# EAGLE board TXB0104_breakout Panel v10 (EAGLE 6.4), part 1 of 3
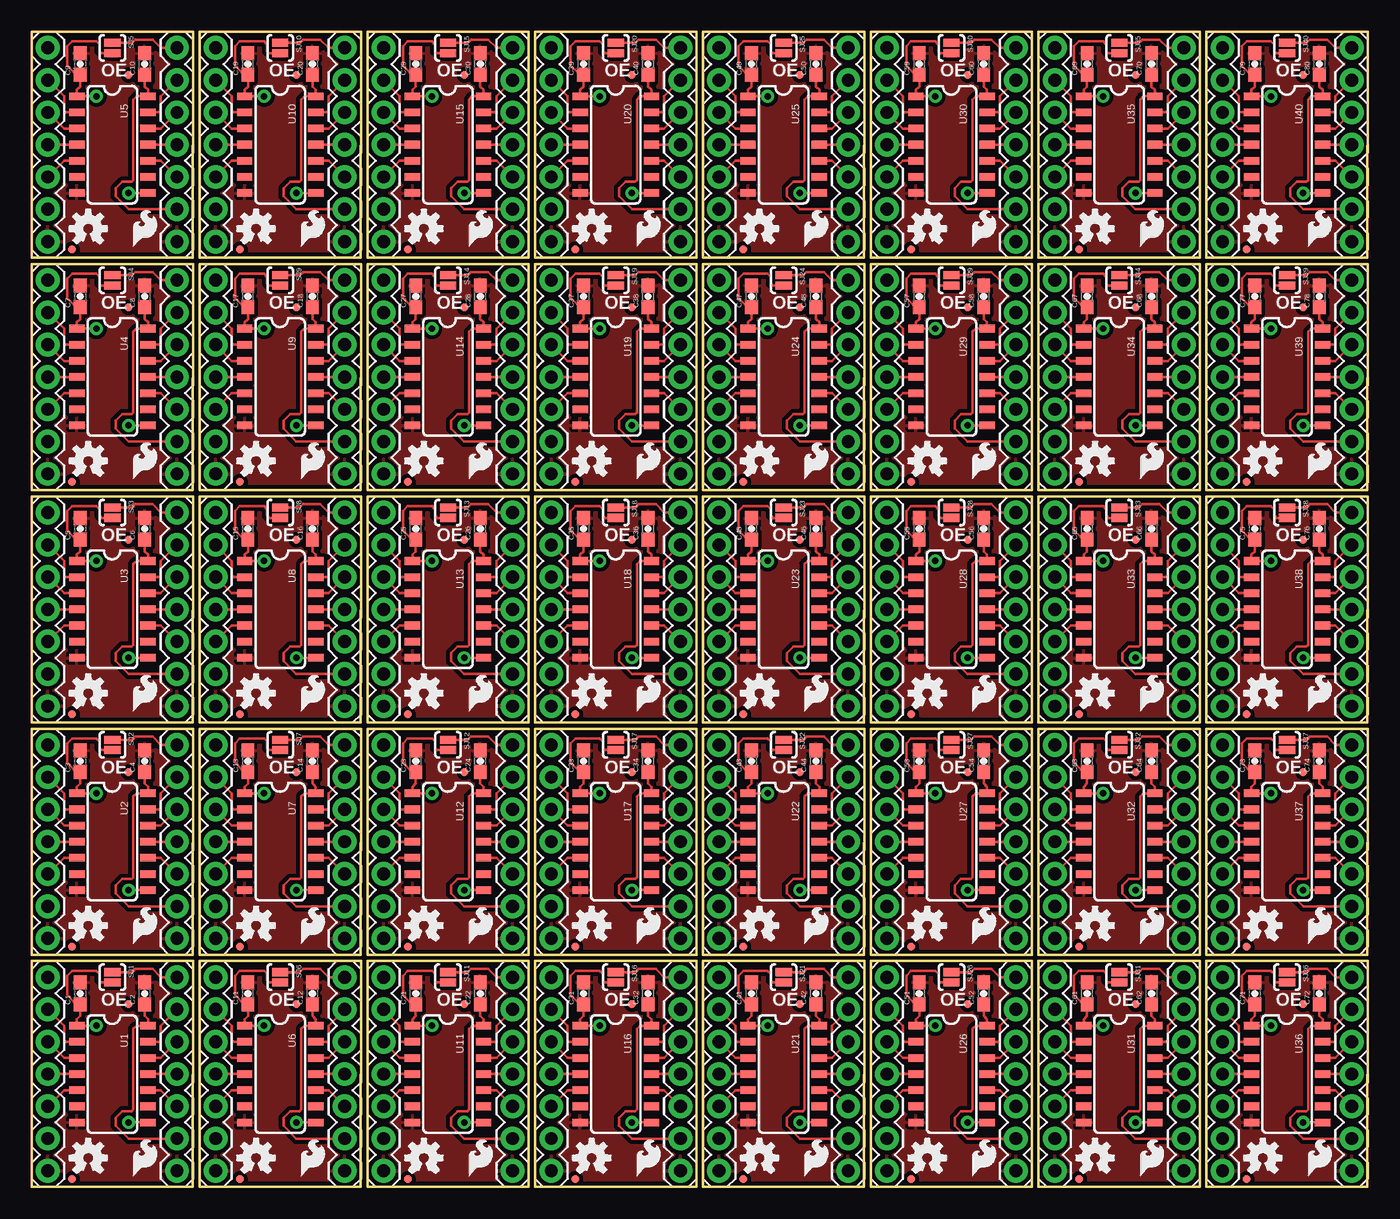
[diagram p0: board, top side]
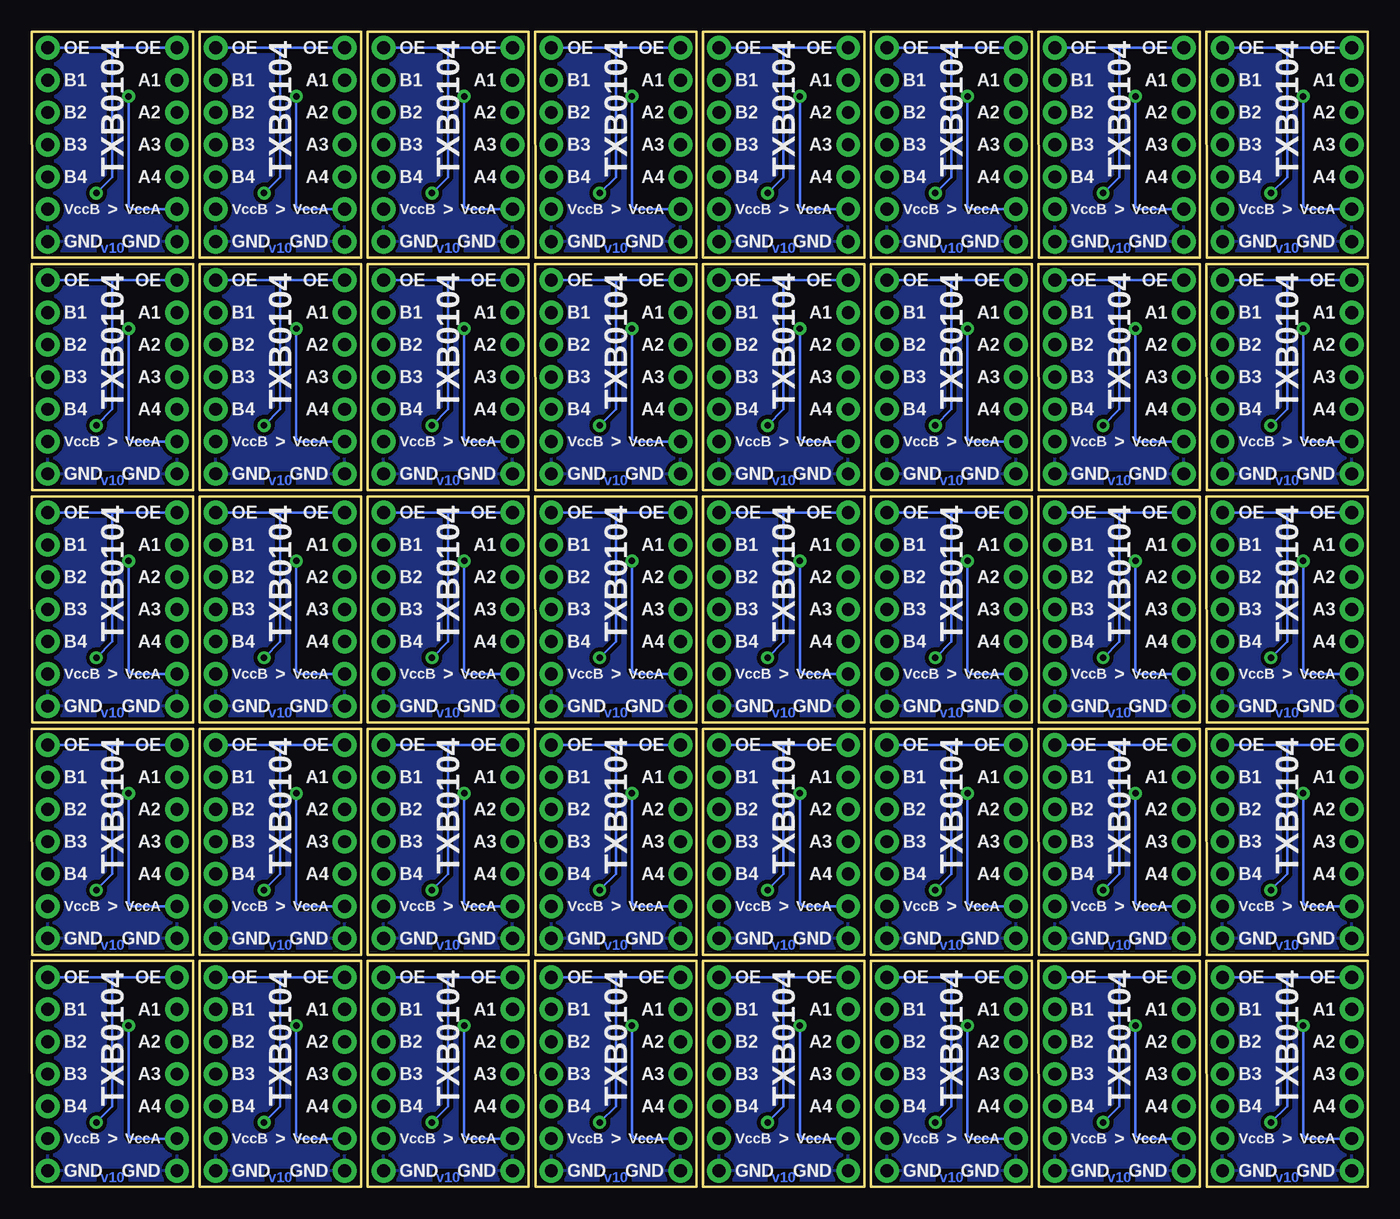
[diagram p1: board, bottom side, seen from below]

Size 105.16 x 90.93 mm. Coordinates in mm from the lower left corner, seen from the top.
Outline: 0,0 12.68,0 12.7,17.78 0,17.78 0,0
Outline: 0,18.29 12.68,18.29 12.7,36.07 0,36.07 0,18.29
Outline: 0,36.58 12.68,36.58 12.7,54.36 0,54.36 0,36.58
Outline: 0,54.86 12.68,54.86 12.7,72.64 0,72.64 0,54.86
Outline: 0,73.15 12.68,73.15 12.7,90.93 0,90.93 0,73.15
Outline: 13.21,0 25.89,0 25.91,17.78 13.21,17.78 13.21,0
Outline: 13.21,18.29 25.89,18.29 25.91,36.07 13.21,36.07 13.21,18.29
Outline: 13.21,36.58 25.89,36.58 25.91,54.36 13.21,54.36 13.21,36.58
Outline: 13.21,54.86 25.89,54.86 25.91,72.64 13.21,72.64 13.21,54.86
Outline: 13.21,73.15 25.89,73.15 25.91,90.93 13.21,90.93 13.21,73.15
Outline: 26.42,0 39.1,0 39.12,17.78 26.42,17.78 26.42,0
Outline: 26.42,18.29 39.1,18.29 39.12,36.07 26.42,36.07 26.42,18.29
Outline: 26.42,36.58 39.1,36.58 39.12,54.36 26.42,54.36 26.42,36.58
Outline: 26.42,54.86 39.1,54.86 39.12,72.64 26.42,72.64 26.42,54.86
Outline: 26.42,73.15 39.1,73.15 39.12,90.93 26.42,90.93 26.42,73.15
Outline: 39.62,0 52.3,0 52.32,17.78 39.62,17.78 39.62,0
Outline: 39.62,18.29 52.3,18.29 52.32,36.07 39.62,36.07 39.62,18.29
Outline: 39.62,36.58 52.3,36.58 52.32,54.36 39.62,54.36 39.62,36.58
Outline: 39.62,54.86 52.3,54.86 52.32,72.64 39.62,72.64 39.62,54.86
Outline: 39.62,73.15 52.3,73.15 52.32,90.93 39.62,90.93 39.62,73.15
Outline: 52.83,0 65.51,0 65.53,17.78 52.83,17.78 52.83,0
Outline: 52.83,18.29 65.51,18.29 65.53,36.07 52.83,36.07 52.83,18.29
Outline: 52.83,36.58 65.51,36.58 65.53,54.36 52.83,54.36 52.83,36.58
Outline: 52.83,54.86 65.51,54.86 65.53,72.64 52.83,72.64 52.83,54.86
Outline: 52.83,73.15 65.51,73.15 65.53,90.93 52.83,90.93 52.83,73.15
Outline: 66.04,0 78.72,0 78.74,17.78 66.04,17.78 66.04,0
Outline: 66.04,18.29 78.72,18.29 78.74,36.07 66.04,36.07 66.04,18.29
Outline: 66.04,36.58 78.72,36.58 78.74,54.36 66.04,54.36 66.04,36.58
Outline: 66.04,54.86 78.72,54.86 78.74,72.64 66.04,72.64 66.04,54.86
Outline: 66.04,73.15 78.72,73.15 78.74,90.93 66.04,90.93 66.04,73.15
Outline: 79.25,0 91.93,0 91.95,17.78 79.25,17.78 79.25,0
Outline: 79.25,18.29 91.93,18.29 91.95,36.07 79.25,36.07 79.25,18.29
Outline: 79.25,36.58 91.93,36.58 91.95,54.36 79.25,54.36 79.25,36.58
Outline: 79.25,54.86 91.93,54.86 91.95,72.64 79.25,72.64 79.25,54.86
Outline: 79.25,73.15 91.93,73.15 91.95,90.93 79.25,90.93 79.25,73.15
Outline: 92.46,0 105.14,0 105.16,17.78 92.46,17.78 92.46,0
Outline: 92.46,18.29 105.14,18.29 105.16,36.07 92.46,36.07 92.46,18.29
Outline: 92.46,36.58 105.14,36.58 105.16,54.36 92.46,54.36 92.46,36.58
Outline: 92.46,54.86 105.14,54.86 105.16,72.64 92.46,72.64 92.46,54.86
Outline: 92.46,73.15 105.14,73.15 105.16,90.93 92.46,90.93 92.46,73.15
Copper layers (1*16): Top 0.035mm / dielectric 1.5mm / Bottom 0.035mm
Design rules "Sparkfun": minimum track width 8mil, minimum drill 20mil, track to track 8mil, track to pad 8mil, pad to pad 8mil, via to via 8mil, smd to smd 8mil, copper to edge 8mil, drill to drill 8mil, minimum pad ring 12mil, minimum via ring 10mil, stop-mask expansion 4mil, vias tented up to drill 20mil, thermal gap 10mil

## Footprints (pad centres in the part's own frame; a part is rotated, then mirrored left to right if it is on the bottom)
0603-CAP = smd 1.1 x 1: 1 -0.85,0; 2 0.85,0
MICRO-FIDUCIAL = smd 0.635 x 0.635: 1 0,0
1X07 = drill 1.016 pad 1.88: 1 0,0; 2 2.54,0; 3 5.08,0; 4 7.62,0; 5 10.16,0; 6 12.7,0; 7 15.24,0
SJ_2S-NOTRACE = smd 0.635 x 1.27: 1 -0.401,0; 2 0.413,0
SO14 = smd 0.6 x 1.2: 1 -3.81,-2.8; 2 -2.54,-2.8; 3 -1.27,-2.8; 4 0,-2.8; 5 1.27,-2.8; 6 2.54,-2.8; 7 3.81,-2.8; 8 3.81,2.8; 9 2.54,2.8; 10 1.27,2.8; 11 0,2.8; 12 -1.27,2.8; 13 -2.54,2.8; 14 -3.81,2.8

## Placement (x,y rotation side)
C1  0.1uF  [0603-CAP]  3.81,15.24 90 top
C2  0.1uF  [0603-CAP]  8.89,15.24 90 top
C3  0.1uF  [0603-CAP]  3.81,33.53 90 top
C4  0.1uF  [0603-CAP]  8.89,33.53 90 top
C5  0.1uF  [0603-CAP]  3.81,51.82 90 top
C6  0.1uF  [0603-CAP]  8.89,51.82 90 top
C7  0.1uF  [0603-CAP]  3.81,70.1 90 top
C8  0.1uF  [0603-CAP]  8.89,70.1 90 top
C9  0.1uF  [0603-CAP]  3.81,88.39 90 top
C10  0.1uF  [0603-CAP]  8.89,88.39 90 top
C11  0.1uF  [0603-CAP]  17.02,15.24 90 top
C12  0.1uF  [0603-CAP]  22.1,15.24 90 top
C13  0.1uF  [0603-CAP]  17.02,33.53 90 top
C14  0.1uF  [0603-CAP]  22.1,33.53 90 top
C15  0.1uF  [0603-CAP]  17.02,51.82 90 top
C16  0.1uF  [0603-CAP]  22.1,51.82 90 top
C17  0.1uF  [0603-CAP]  17.02,70.1 90 top
C18  0.1uF  [0603-CAP]  22.1,70.1 90 top
C19  0.1uF  [0603-CAP]  17.02,88.39 90 top
C20  0.1uF  [0603-CAP]  22.1,88.39 90 top
C21  0.1uF  [0603-CAP]  30.23,15.24 90 top
C22  0.1uF  [0603-CAP]  35.31,15.24 90 top
C23  0.1uF  [0603-CAP]  30.23,33.53 90 top
C24  0.1uF  [0603-CAP]  35.31,33.53 90 top
C25  0.1uF  [0603-CAP]  30.23,51.82 90 top
C26  0.1uF  [0603-CAP]  35.31,51.82 90 top
C27  0.1uF  [0603-CAP]  30.23,70.1 90 top
C28  0.1uF  [0603-CAP]  35.31,70.1 90 top
C29  0.1uF  [0603-CAP]  30.23,88.39 90 top
C30  0.1uF  [0603-CAP]  35.31,88.39 90 top
C31  0.1uF  [0603-CAP]  43.43,15.24 90 top
C32  0.1uF  [0603-CAP]  48.51,15.24 90 top
C33  0.1uF  [0603-CAP]  43.43,33.53 90 top
C34  0.1uF  [0603-CAP]  48.51,33.53 90 top
C35  0.1uF  [0603-CAP]  43.43,51.82 90 top
C36  0.1uF  [0603-CAP]  48.51,51.82 90 top
C37  0.1uF  [0603-CAP]  43.43,70.1 90 top
C38  0.1uF  [0603-CAP]  48.51,70.1 90 top
C39  0.1uF  [0603-CAP]  43.43,88.39 90 top
C40  0.1uF  [0603-CAP]  48.51,88.39 90 top
C41  0.1uF  [0603-CAP]  56.64,15.24 90 top
C42  0.1uF  [0603-CAP]  61.72,15.24 90 top
C43  0.1uF  [0603-CAP]  56.64,33.53 90 top
C44  0.1uF  [0603-CAP]  61.72,33.53 90 top
C45  0.1uF  [0603-CAP]  56.64,51.82 90 top
C46  0.1uF  [0603-CAP]  61.72,51.82 90 top
C47  0.1uF  [0603-CAP]  56.64,70.1 90 top
C48  0.1uF  [0603-CAP]  61.72,70.1 90 top
C49  0.1uF  [0603-CAP]  56.64,88.39 90 top
C50  0.1uF  [0603-CAP]  61.72,88.39 90 top
C51  0.1uF  [0603-CAP]  69.85,15.24 90 top
C52  0.1uF  [0603-CAP]  74.93,15.24 90 top
C53  0.1uF  [0603-CAP]  69.85,33.53 90 top
C54  0.1uF  [0603-CAP]  74.93,33.53 90 top
C55  0.1uF  [0603-CAP]  69.85,51.82 90 top
C56  0.1uF  [0603-CAP]  74.93,51.82 90 top
C57  0.1uF  [0603-CAP]  69.85,70.1 90 top
C58  0.1uF  [0603-CAP]  74.93,70.1 90 top
C59  0.1uF  [0603-CAP]  69.85,88.39 90 top
C60  0.1uF  [0603-CAP]  74.93,88.39 90 top
C61  0.1uF  [0603-CAP]  83.06,15.24 90 top
C62  0.1uF  [0603-CAP]  88.14,15.24 90 top
C63  0.1uF  [0603-CAP]  83.06,33.53 90 top
C64  0.1uF  [0603-CAP]  88.14,33.53 90 top
C65  0.1uF  [0603-CAP]  83.06,51.82 90 top
C66  0.1uF  [0603-CAP]  88.14,51.82 90 top
C67  0.1uF  [0603-CAP]  83.06,70.1 90 top
C68  0.1uF  [0603-CAP]  88.14,70.1 90 top
C69  0.1uF  [0603-CAP]  83.06,88.39 90 top
C70  0.1uF  [0603-CAP]  88.14,88.39 90 top
C71  0.1uF  [0603-CAP]  96.27,15.24 90 top
C72  0.1uF  [0603-CAP]  101.35,15.24 90 top
C73  0.1uF  [0603-CAP]  96.27,33.53 90 top
C74  0.1uF  [0603-CAP]  101.35,33.53 90 top
C75  0.1uF  [0603-CAP]  96.27,51.82 90 top
C76  0.1uF  [0603-CAP]  101.35,51.82 90 top
C77  0.1uF  [0603-CAP]  96.27,70.1 90 top
C78  0.1uF  [0603-CAP]  101.35,70.1 90 top
C79  0.1uF  [0603-CAP]  96.27,88.39 90 top
C80  0.1uF  [0603-CAP]  101.35,88.39 90 top
FID1  FIDUCIALUFIDUCIAL  [MICRO-FIDUCIAL]  7.62,14.38 0 top
FID2  FIDUCIALUFIDUCIAL  [MICRO-FIDUCIAL]  3.17,0.64 0 top
FID3  FIDUCIALUFIDUCIAL  [MICRO-FIDUCIAL]  7.62,32.66 0 top
FID4  FIDUCIALUFIDUCIAL  [MICRO-FIDUCIAL]  3.17,18.92 0 top
FID5  FIDUCIALUFIDUCIAL  [MICRO-FIDUCIAL]  7.62,50.95 0 top
FID6  FIDUCIALUFIDUCIAL  [MICRO-FIDUCIAL]  3.17,37.21 0 top
FID7  FIDUCIALUFIDUCIAL  [MICRO-FIDUCIAL]  7.62,69.24 0 top
FID8  FIDUCIALUFIDUCIAL  [MICRO-FIDUCIAL]  3.17,55.5 0 top
FID9  FIDUCIALUFIDUCIAL  [MICRO-FIDUCIAL]  7.62,87.53 0 top
FID10  FIDUCIALUFIDUCIAL  [MICRO-FIDUCIAL]  3.17,73.79 0 top
FID11  FIDUCIALUFIDUCIAL  [MICRO-FIDUCIAL]  20.83,14.38 0 top
FID12  FIDUCIALUFIDUCIAL  [MICRO-FIDUCIAL]  16.38,0.64 0 top
FID13  FIDUCIALUFIDUCIAL  [MICRO-FIDUCIAL]  20.83,32.66 0 top
FID14  FIDUCIALUFIDUCIAL  [MICRO-FIDUCIAL]  16.38,18.92 0 top
FID15  FIDUCIALUFIDUCIAL  [MICRO-FIDUCIAL]  20.83,50.95 0 top
FID16  FIDUCIALUFIDUCIAL  [MICRO-FIDUCIAL]  16.38,37.21 0 top
FID17  FIDUCIALUFIDUCIAL  [MICRO-FIDUCIAL]  20.83,69.24 0 top
FID18  FIDUCIALUFIDUCIAL  [MICRO-FIDUCIAL]  16.38,55.5 0 top
FID19  FIDUCIALUFIDUCIAL  [MICRO-FIDUCIAL]  20.83,87.53 0 top
FID20  FIDUCIALUFIDUCIAL  [MICRO-FIDUCIAL]  16.38,73.79 0 top
FID21  FIDUCIALUFIDUCIAL  [MICRO-FIDUCIAL]  34.04,14.38 0 top
FID22  FIDUCIALUFIDUCIAL  [MICRO-FIDUCIAL]  29.59,0.64 0 top
FID23  FIDUCIALUFIDUCIAL  [MICRO-FIDUCIAL]  34.04,32.66 0 top
FID24  FIDUCIALUFIDUCIAL  [MICRO-FIDUCIAL]  29.59,18.92 0 top
FID25  FIDUCIALUFIDUCIAL  [MICRO-FIDUCIAL]  34.04,50.95 0 top
FID26  FIDUCIALUFIDUCIAL  [MICRO-FIDUCIAL]  29.59,37.21 0 top
FID27  FIDUCIALUFIDUCIAL  [MICRO-FIDUCIAL]  34.04,69.24 0 top
FID28  FIDUCIALUFIDUCIAL  [MICRO-FIDUCIAL]  29.59,55.5 0 top
FID29  FIDUCIALUFIDUCIAL  [MICRO-FIDUCIAL]  34.04,87.53 0 top
FID30  FIDUCIALUFIDUCIAL  [MICRO-FIDUCIAL]  29.59,73.79 0 top
FID31  FIDUCIALUFIDUCIAL  [MICRO-FIDUCIAL]  47.24,14.38 0 top
FID32  FIDUCIALUFIDUCIAL  [MICRO-FIDUCIAL]  42.8,0.64 0 top
FID33  FIDUCIALUFIDUCIAL  [MICRO-FIDUCIAL]  47.24,32.66 0 top
FID34  FIDUCIALUFIDUCIAL  [MICRO-FIDUCIAL]  42.8,18.92 0 top
FID35  FIDUCIALUFIDUCIAL  [MICRO-FIDUCIAL]  47.24,50.95 0 top
FID36  FIDUCIALUFIDUCIAL  [MICRO-FIDUCIAL]  42.8,37.21 0 top
FID37  FIDUCIALUFIDUCIAL  [MICRO-FIDUCIAL]  47.24,69.24 0 top
FID38  FIDUCIALUFIDUCIAL  [MICRO-FIDUCIAL]  42.8,55.5 0 top
FID39  FIDUCIALUFIDUCIAL  [MICRO-FIDUCIAL]  47.24,87.53 0 top
FID40  FIDUCIALUFIDUCIAL  [MICRO-FIDUCIAL]  42.8,73.79 0 top
FID41  FIDUCIALUFIDUCIAL  [MICRO-FIDUCIAL]  60.45,14.38 0 top
FID42  FIDUCIALUFIDUCIAL  [MICRO-FIDUCIAL]  56.01,0.64 0 top
FID43  FIDUCIALUFIDUCIAL  [MICRO-FIDUCIAL]  60.45,32.66 0 top
FID44  FIDUCIALUFIDUCIAL  [MICRO-FIDUCIAL]  56.01,18.92 0 top
FID45  FIDUCIALUFIDUCIAL  [MICRO-FIDUCIAL]  60.45,50.95 0 top
FID46  FIDUCIALUFIDUCIAL  [MICRO-FIDUCIAL]  56.01,37.21 0 top
FID47  FIDUCIALUFIDUCIAL  [MICRO-FIDUCIAL]  60.45,69.24 0 top
FID48  FIDUCIALUFIDUCIAL  [MICRO-FIDUCIAL]  56.01,55.5 0 top
FID49  FIDUCIALUFIDUCIAL  [MICRO-FIDUCIAL]  60.45,87.53 0 top
FID50  FIDUCIALUFIDUCIAL  [MICRO-FIDUCIAL]  56.01,73.79 0 top
FID51  FIDUCIALUFIDUCIAL  [MICRO-FIDUCIAL]  73.66,14.38 0 top
FID52  FIDUCIALUFIDUCIAL  [MICRO-FIDUCIAL]  69.22,0.64 0 top
FID53  FIDUCIALUFIDUCIAL  [MICRO-FIDUCIAL]  73.66,32.66 0 top
FID54  FIDUCIALUFIDUCIAL  [MICRO-FIDUCIAL]  69.22,18.92 0 top
FID55  FIDUCIALUFIDUCIAL  [MICRO-FIDUCIAL]  73.66,50.95 0 top
FID56  FIDUCIALUFIDUCIAL  [MICRO-FIDUCIAL]  69.22,37.21 0 top
FID57  FIDUCIALUFIDUCIAL  [MICRO-FIDUCIAL]  73.66,69.24 0 top
FID58  FIDUCIALUFIDUCIAL  [MICRO-FIDUCIAL]  69.22,55.5 0 top
FID59  FIDUCIALUFIDUCIAL  [MICRO-FIDUCIAL]  73.66,87.53 0 top
FID60  FIDUCIALUFIDUCIAL  [MICRO-FIDUCIAL]  69.22,73.79 0 top
FID61  FIDUCIALUFIDUCIAL  [MICRO-FIDUCIAL]  86.87,14.38 0 top
FID62  FIDUCIALUFIDUCIAL  [MICRO-FIDUCIAL]  82.42,0.64 0 top
FID63  FIDUCIALUFIDUCIAL  [MICRO-FIDUCIAL]  86.87,32.66 0 top
FID64  FIDUCIALUFIDUCIAL  [MICRO-FIDUCIAL]  82.42,18.92 0 top
FID65  FIDUCIALUFIDUCIAL  [MICRO-FIDUCIAL]  86.87,50.95 0 top
FID66  FIDUCIALUFIDUCIAL  [MICRO-FIDUCIAL]  82.42,37.21 0 top
FID67  FIDUCIALUFIDUCIAL  [MICRO-FIDUCIAL]  86.87,69.24 0 top
FID68  FIDUCIALUFIDUCIAL  [MICRO-FIDUCIAL]  82.42,55.5 0 top
FID69  FIDUCIALUFIDUCIAL  [MICRO-FIDUCIAL]  86.87,87.53 0 top
FID70  FIDUCIALUFIDUCIAL  [MICRO-FIDUCIAL]  82.42,73.79 0 top
FID71  FIDUCIALUFIDUCIAL  [MICRO-FIDUCIAL]  100.08,14.38 0 top
FID72  FIDUCIALUFIDUCIAL  [MICRO-FIDUCIAL]  95.63,0.64 0 top
FID73  FIDUCIALUFIDUCIAL  [MICRO-FIDUCIAL]  100.08,32.66 0 top
FID74  FIDUCIALUFIDUCIAL  [MICRO-FIDUCIAL]  95.63,18.92 0 top
FID75  FIDUCIALUFIDUCIAL  [MICRO-FIDUCIAL]  100.08,50.95 0 top
FID76  FIDUCIALUFIDUCIAL  [MICRO-FIDUCIAL]  95.63,37.21 0 top
FID77  FIDUCIALUFIDUCIAL  [MICRO-FIDUCIAL]  100.08,69.24 0 top
FID78  FIDUCIALUFIDUCIAL  [MICRO-FIDUCIAL]  95.63,55.5 0 top
FID79  FIDUCIALUFIDUCIAL  [MICRO-FIDUCIAL]  100.08,87.53 0 top
FID80  FIDUCIALUFIDUCIAL  [MICRO-FIDUCIAL]  95.63,73.79 0 top
JP1  [1X07]  1.27,1.27 90 top
JP2  [1X07]  11.43,1.27 90 top
JP3  [1X07]  1.27,19.56 90 top
JP4  [1X07]  11.43,19.56 90 top
JP5  [1X07]  1.27,37.85 90 top
JP6  [1X07]  11.43,37.85 90 top
JP7  [1X07]  1.27,56.13 90 top
JP8  [1X07]  11.43,56.13 90 top
JP9  [1X07]  1.27,74.42 90 top
JP10  [1X07]  11.43,74.42 90 top
JP11  [1X07]  14.48,1.27 90 top
JP12  [1X07]  24.64,1.27 90 top
JP13  [1X07]  14.48,19.56 90 top
JP14  [1X07]  24.64,19.56 90 top
JP15  [1X07]  14.48,37.85 90 top
JP16  [1X07]  24.64,37.85 90 top
JP17  [1X07]  14.48,56.13 90 top
JP18  [1X07]  24.64,56.13 90 top
JP19  [1X07]  14.48,74.42 90 top
JP20  [1X07]  24.64,74.42 90 top
JP21  [1X07]  27.69,1.27 90 top
JP22  [1X07]  37.85,1.27 90 top
JP23  [1X07]  27.69,19.56 90 top
JP24  [1X07]  37.85,19.56 90 top
JP25  [1X07]  27.69,37.85 90 top
JP26  [1X07]  37.85,37.85 90 top
JP27  [1X07]  27.69,56.13 90 top
JP28  [1X07]  37.85,56.13 90 top
JP29  [1X07]  27.69,74.42 90 top
JP30  [1X07]  37.85,74.42 90 top
JP31  [1X07]  40.89,1.27 90 top
JP32  [1X07]  51.05,1.27 90 top
JP33  [1X07]  40.89,19.56 90 top
JP34  [1X07]  51.05,19.56 90 top
JP35  [1X07]  40.89,37.85 90 top
JP36  [1X07]  51.05,37.85 90 top
JP37  [1X07]  40.89,56.13 90 top
JP38  [1X07]  51.05,56.13 90 top
JP39  [1X07]  40.89,74.42 90 top
JP40  [1X07]  51.05,74.42 90 top
JP41  [1X07]  54.1,1.27 90 top
JP42  [1X07]  64.26,1.27 90 top
JP43  [1X07]  54.1,19.56 90 top
JP44  [1X07]  64.26,19.56 90 top
JP45  [1X07]  54.1,37.85 90 top
JP46  [1X07]  64.26,37.85 90 top
JP47  [1X07]  54.1,56.13 90 top
JP48  [1X07]  64.26,56.13 90 top
JP49  [1X07]  54.1,74.42 90 top
JP50  [1X07]  64.26,74.42 90 top
JP51  [1X07]  67.31,1.27 90 top
JP52  [1X07]  77.47,1.27 90 top
JP53  [1X07]  67.31,19.56 90 top
JP54  [1X07]  77.47,19.56 90 top
JP55  [1X07]  67.31,37.85 90 top
JP56  [1X07]  77.47,37.85 90 top
JP57  [1X07]  67.31,56.13 90 top
JP58  [1X07]  77.47,56.13 90 top
JP59  [1X07]  67.31,74.42 90 top
JP60  [1X07]  77.47,74.42 90 top
JP61  [1X07]  80.52,1.27 90 top
JP62  [1X07]  90.68,1.27 90 top
JP63  [1X07]  80.52,19.56 90 top
JP64  [1X07]  90.68,19.56 90 top
JP65  [1X07]  80.52,37.85 90 top
JP66  [1X07]  90.68,37.85 90 top
JP67  [1X07]  80.52,56.13 90 top
JP68  [1X07]  90.68,56.13 90 top
JP69  [1X07]  80.52,74.42 90 top
JP70  [1X07]  90.68,74.42 90 top
JP71  [1X07]  93.73,1.27 90 top
JP72  [1X07]  103.89,1.27 90 top
JP73  [1X07]  93.73,19.56 90 top
JP74  [1X07]  103.89,19.56 90 top
JP75  [1X07]  93.73,37.85 90 top
JP76  [1X07]  103.89,37.85 90 top
JP77  [1X07]  93.73,56.13 90 top
JP78  [1X07]  103.89,56.13 90 top
JP79  [1X07]  93.73,74.42 90 top
JP80  [1X07]  103.89,74.42 90 top
LOGO1  LOGO-SFESK  [SFE-LOGO-FLAME]  8,0.89 0 top
LOGO2  OSHW-LOGOS  [OSHW-LOGO-S]  4.45,2.29 0 top
LOGO3  LOGO-SFESK  [SFE-LOGO-FLAME]  8,19.18 0 top
LOGO4  OSHW-LOGOS  [OSHW-LOGO-S]  4.45,20.57 0 top
LOGO5  LOGO-SFESK  [SFE-LOGO-FLAME]  8,37.47 0 top
LOGO6  OSHW-LOGOS  [OSHW-LOGO-S]  4.45,38.86 0 top
LOGO7  LOGO-SFESK  [SFE-LOGO-FLAME]  8,55.75 0 top
LOGO8  OSHW-LOGOS  [OSHW-LOGO-S]  4.45,57.15 0 top
LOGO9  LOGO-SFESK  [SFE-LOGO-FLAME]  8,74.04 0 top
LOGO10  OSHW-LOGOS  [OSHW-LOGO-S]  4.45,75.44 0 top
LOGO11  LOGO-SFESK  [SFE-LOGO-FLAME]  21.21,0.89 0 top
LOGO12  OSHW-LOGOS  [OSHW-LOGO-S]  17.65,2.29 0 top
LOGO13  LOGO-SFESK  [SFE-LOGO-FLAME]  21.21,19.18 0 top
LOGO14  OSHW-LOGOS  [OSHW-LOGO-S]  17.65,20.57 0 top
LOGO15  LOGO-SFESK  [SFE-LOGO-FLAME]  21.21,37.47 0 top
LOGO16  OSHW-LOGOS  [OSHW-LOGO-S]  17.65,38.86 0 top
LOGO17  LOGO-SFESK  [SFE-LOGO-FLAME]  21.21,55.75 0 top
LOGO18  OSHW-LOGOS  [OSHW-LOGO-S]  17.65,57.15 0 top
LOGO19  LOGO-SFESK  [SFE-LOGO-FLAME]  21.21,74.04 0 top
LOGO20  OSHW-LOGOS  [OSHW-LOGO-S]  17.65,75.44 0 top
LOGO21  LOGO-SFESK  [SFE-LOGO-FLAME]  34.42,0.89 0 top
LOGO22  OSHW-LOGOS  [OSHW-LOGO-S]  30.86,2.29 0 top
LOGO23  LOGO-SFESK  [SFE-LOGO-FLAME]  34.42,19.18 0 top
LOGO24  OSHW-LOGOS  [OSHW-LOGO-S]  30.86,20.57 0 top
LOGO25  LOGO-SFESK  [SFE-LOGO-FLAME]  34.42,37.47 0 top
LOGO26  OSHW-LOGOS  [OSHW-LOGO-S]  30.86,38.86 0 top
LOGO27  LOGO-SFESK  [SFE-LOGO-FLAME]  34.42,55.75 0 top
LOGO28  OSHW-LOGOS  [OSHW-LOGO-S]  30.86,57.15 0 top
LOGO29  LOGO-SFESK  [SFE-LOGO-FLAME]  34.42,74.04 0 top
LOGO30  OSHW-LOGOS  [OSHW-LOGO-S]  30.86,75.44 0 top
LOGO31  LOGO-SFESK  [SFE-LOGO-FLAME]  47.62,0.89 0 top
LOGO32  OSHW-LOGOS  [OSHW-LOGO-S]  44.07,2.29 0 top
LOGO33  LOGO-SFESK  [SFE-LOGO-FLAME]  47.62,19.18 0 top
LOGO34  OSHW-LOGOS  [OSHW-LOGO-S]  44.07,20.57 0 top
LOGO35  LOGO-SFESK  [SFE-LOGO-FLAME]  47.62,37.47 0 top
LOGO36  OSHW-LOGOS  [OSHW-LOGO-S]  44.07,38.86 0 top
LOGO37  LOGO-SFESK  [SFE-LOGO-FLAME]  47.62,55.75 0 top
LOGO38  OSHW-LOGOS  [OSHW-LOGO-S]  44.07,57.15 0 top
LOGO39  LOGO-SFESK  [SFE-LOGO-FLAME]  47.62,74.04 0 top
LOGO40  OSHW-LOGOS  [OSHW-LOGO-S]  44.07,75.44 0 top
LOGO41  LOGO-SFESK  [SFE-LOGO-FLAME]  60.83,0.89 0 top
LOGO42  OSHW-LOGOS  [OSHW-LOGO-S]  57.28,2.29 0 top
LOGO43  LOGO-SFESK  [SFE-LOGO-FLAME]  60.83,19.18 0 top
LOGO44  OSHW-LOGOS  [OSHW-LOGO-S]  57.28,20.57 0 top
LOGO45  LOGO-SFESK  [SFE-LOGO-FLAME]  60.83,37.47 0 top
LOGO46  OSHW-LOGOS  [OSHW-LOGO-S]  57.28,38.86 0 top
LOGO47  LOGO-SFESK  [SFE-LOGO-FLAME]  60.83,55.75 0 top
LOGO48  OSHW-LOGOS  [OSHW-LOGO-S]  57.28,57.15 0 top
LOGO49  LOGO-SFESK  [SFE-LOGO-FLAME]  60.83,74.04 0 top
LOGO50  OSHW-LOGOS  [OSHW-LOGO-S]  57.28,75.44 0 top
LOGO51  LOGO-SFESK  [SFE-LOGO-FLAME]  74.04,0.89 0 top
LOGO52  OSHW-LOGOS  [OSHW-LOGO-S]  70.48,2.29 0 top
LOGO53  LOGO-SFESK  [SFE-LOGO-FLAME]  74.04,19.18 0 top
LOGO54  OSHW-LOGOS  [OSHW-LOGO-S]  70.48,20.57 0 top
LOGO55  LOGO-SFESK  [SFE-LOGO-FLAME]  74.04,37.47 0 top
LOGO56  OSHW-LOGOS  [OSHW-LOGO-S]  70.48,38.86 0 top
LOGO57  LOGO-SFESK  [SFE-LOGO-FLAME]  74.04,55.75 0 top
LOGO58  OSHW-LOGOS  [OSHW-LOGO-S]  70.48,57.15 0 top
LOGO59  LOGO-SFESK  [SFE-LOGO-FLAME]  74.04,74.04 0 top
LOGO60  OSHW-LOGOS  [OSHW-LOGO-S]  70.48,75.44 0 top
LOGO61  LOGO-SFESK  [SFE-LOGO-FLAME]  87.25,0.89 0 top
LOGO62  OSHW-LOGOS  [OSHW-LOGO-S]  83.69,2.29 0 top
LOGO63  LOGO-SFESK  [SFE-LOGO-FLAME]  87.25,19.18 0 top
LOGO64  OSHW-LOGOS  [OSHW-LOGO-S]  83.69,20.57 0 top
LOGO65  LOGO-SFESK  [SFE-LOGO-FLAME]  87.25,37.47 0 top
LOGO66  OSHW-LOGOS  [OSHW-LOGO-S]  83.69,38.86 0 top
LOGO67  LOGO-SFESK  [SFE-LOGO-FLAME]  87.25,55.75 0 top
LOGO68  OSHW-LOGOS  [OSHW-LOGO-S]  83.69,57.15 0 top
LOGO69  LOGO-SFESK  [SFE-LOGO-FLAME]  87.25,74.04 0 top
LOGO70  OSHW-LOGOS  [OSHW-LOGO-S]  83.69,75.44 0 top
LOGO71  LOGO-SFESK  [SFE-LOGO-FLAME]  100.46,0.89 0 top
LOGO72  OSHW-LOGOS  [OSHW-LOGO-S]  96.9,2.29 0 top
LOGO73  LOGO-SFESK  [SFE-LOGO-FLAME]  100.46,19.18 0 top
LOGO74  OSHW-LOGOS  [OSHW-LOGO-S]  96.9,20.57 0 top
LOGO75  LOGO-SFESK  [SFE-LOGO-FLAME]  100.46,37.47 0 top
LOGO76  OSHW-LOGOS  [OSHW-LOGO-S]  96.9,38.86 0 top
LOGO77  LOGO-SFESK  [SFE-LOGO-FLAME]  100.46,55.75 0 top
LOGO78  OSHW-LOGOS  [OSHW-LOGO-S]  96.9,57.15 0 top
LOGO79  LOGO-SFESK  [SFE-LOGO-FLAME]  100.46,74.04 0 top
LOGO80  OSHW-LOGOS  [OSHW-LOGO-S]  96.9,75.44 0 top
SJ1  SOLDERJUMPERNC2  [SJ_2S-NOTRACE]  6.35,16.51 270 top
SJ2  SOLDERJUMPERNC2  [SJ_2S-NOTRACE]  6.35,34.8 270 top
SJ3  SOLDERJUMPERNC2  [SJ_2S-NOTRACE]  6.35,53.09 270 top
SJ4  SOLDERJUMPERNC2  [SJ_2S-NOTRACE]  6.35,71.37 270 top
SJ5  SOLDERJUMPERNC2  [SJ_2S-NOTRACE]  6.35,89.66 270 top
SJ6  SOLDERJUMPERNC2  [SJ_2S-NOTRACE]  19.56,16.51 270 top
SJ7  SOLDERJUMPERNC2  [SJ_2S-NOTRACE]  19.56,34.8 270 top
SJ8  SOLDERJUMPERNC2  [SJ_2S-NOTRACE]  19.56,53.09 270 top
SJ9  SOLDERJUMPERNC2  [SJ_2S-NOTRACE]  19.56,71.37 270 top
SJ10  SOLDERJUMPERNC2  [SJ_2S-NOTRACE]  19.56,89.66 270 top
SJ11  SOLDERJUMPERNC2  [SJ_2S-NOTRACE]  32.77,16.51 270 top
SJ12  SOLDERJUMPERNC2  [SJ_2S-NOTRACE]  32.77,34.8 270 top
SJ13  SOLDERJUMPERNC2  [SJ_2S-NOTRACE]  32.77,53.09 270 top
SJ14  SOLDERJUMPERNC2  [SJ_2S-NOTRACE]  32.77,71.37 270 top
SJ15  SOLDERJUMPERNC2  [SJ_2S-NOTRACE]  32.77,89.66 270 top
SJ16  SOLDERJUMPERNC2  [SJ_2S-NOTRACE]  45.97,16.51 270 top
SJ17  SOLDERJUMPERNC2  [SJ_2S-NOTRACE]  45.97,34.8 270 top
SJ18  SOLDERJUMPERNC2  [SJ_2S-NOTRACE]  45.97,53.09 270 top
SJ19  SOLDERJUMPERNC2  [SJ_2S-NOTRACE]  45.97,71.37 270 top
SJ20  SOLDERJUMPERNC2  [SJ_2S-NOTRACE]  45.97,89.66 270 top
SJ21  SOLDERJUMPERNC2  [SJ_2S-NOTRACE]  59.18,16.51 270 top
SJ22  SOLDERJUMPERNC2  [SJ_2S-NOTRACE]  59.18,34.8 270 top
SJ23  SOLDERJUMPERNC2  [SJ_2S-NOTRACE]  59.18,53.09 270 top
SJ24  SOLDERJUMPERNC2  [SJ_2S-NOTRACE]  59.18,71.37 270 top
SJ25  SOLDERJUMPERNC2  [SJ_2S-NOTRACE]  59.18,89.66 270 top
SJ26  SOLDERJUMPERNC2  [SJ_2S-NOTRACE]  72.39,16.51 270 top
SJ27  SOLDERJUMPERNC2  [SJ_2S-NOTRACE]  72.39,34.8 270 top
SJ28  SOLDERJUMPERNC2  [SJ_2S-NOTRACE]  72.39,53.09 270 top
SJ29  SOLDERJUMPERNC2  [SJ_2S-NOTRACE]  72.39,71.37 270 top
SJ30  SOLDERJUMPERNC2  [SJ_2S-NOTRACE]  72.39,89.66 270 top
SJ31  SOLDERJUMPERNC2  [SJ_2S-NOTRACE]  85.6,16.51 270 top
SJ32  SOLDERJUMPERNC2  [SJ_2S-NOTRACE]  85.6,34.8 270 top
SJ33  SOLDERJUMPERNC2  [SJ_2S-NOTRACE]  85.6,53.09 270 top
SJ34  SOLDERJUMPERNC2  [SJ_2S-NOTRACE]  85.6,71.37 270 top
SJ35  SOLDERJUMPERNC2  [SJ_2S-NOTRACE]  85.6,89.66 270 top
SJ36  SOLDERJUMPERNC2  [SJ_2S-NOTRACE]  98.81,16.51 270 top
SJ37  SOLDERJUMPERNC2  [SJ_2S-NOTRACE]  98.81,34.8 270 top
SJ38  SOLDERJUMPERNC2  [SJ_2S-NOTRACE]  98.81,53.09 270 top
SJ39  SOLDERJUMPERNC2  [SJ_2S-NOTRACE]  98.81,71.37 270 top
SJ40  SOLDERJUMPERNC2  [SJ_2S-NOTRACE]  98.81,89.66 270 top
U1  [SO14]  6.35,8.89 270 top
U2  [SO14]  6.35,27.18 270 top
U3  [SO14]  6.35,45.47 270 top
U4  [SO14]  6.35,63.75 270 top
U5  [SO14]  6.35,82.04 270 top
U6  [SO14]  19.56,8.89 270 top
U7  [SO14]  19.56,27.18 270 top
U8  [SO14]  19.56,45.47 270 top
U9  [SO14]  19.56,63.75 270 top
U10  [SO14]  19.56,82.04 270 top
U11  [SO14]  32.77,8.89 270 top
U12  [SO14]  32.77,27.18 270 top
U13  [SO14]  32.77,45.47 270 top
U14  [SO14]  32.77,63.75 270 top
U15  [SO14]  32.77,82.04 270 top
U16  [SO14]  45.97,8.89 270 top
U17  [SO14]  45.97,27.18 270 top
U18  [SO14]  45.97,45.47 270 top
U19  [SO14]  45.97,63.75 270 top
U20  [SO14]  45.97,82.04 270 top
U21  [SO14]  59.18,8.89 270 top
U22  [SO14]  59.18,27.18 270 top
U23  [SO14]  59.18,45.47 270 top
U24  [SO14]  59.18,63.75 270 top
U25  [SO14]  59.18,82.04 270 top
U26  [SO14]  72.39,8.89 270 top
U27  [SO14]  72.39,27.18 270 top
U28  [SO14]  72.39,45.47 270 top
U29  [SO14]  72.39,63.75 270 top
U30  [SO14]  72.39,82.04 270 top
U31  [SO14]  85.6,8.89 270 top
U32  [SO14]  85.6,27.18 270 top
U33  [SO14]  85.6,45.47 270 top
U34  [SO14]  85.6,63.75 270 top
U35  [SO14]  85.6,82.04 270 top
U36  [SO14]  98.81,8.89 270 top
U37  [SO14]  98.81,27.18 270 top
U38  [SO14]  98.81,45.47 270 top
U39  [SO14]  98.81,63.75 270 top
U40  [SO14]  98.81,82.04 270 top

## Library data of the parts
C1-C80 = SparkFun-Capacitors; PROD_ID: CAP-00810
FID1-FID80 LOGO1-LOGO80 = SparkFun-Aesthetics
JP1-JP80 = SparkFun-Connectors
SJ1-SJ40 = SparkFun-Passives
U1-U40 = SparkFun-DigitalIC; PROD_ID: IC-11329

## Nets
3.3V: C1.1 JP1.2 SJ1.2 U1.1
3.3V1: C3.1 JP3.2 SJ2.2 U2.1
3.3V2: C5.1 JP5.2 SJ3.2 U3.1
3.3V3: C7.1 JP7.2 SJ4.2 U4.1
3.3V4: C9.1 JP9.2 SJ5.2 U5.1
3.3V5: C11.1 JP11.2 SJ6.2 U6.1
3.3V6: C13.1 JP13.2 SJ7.2 U7.1
3.3V7: C15.1 JP15.2 SJ8.2 U8.1
3.3V8: C17.1 JP17.2 SJ9.2 U9.1
3.3V9: C19.1 JP19.2 SJ10.2 U10.1
3.3V10: C21.1 JP21.2 SJ11.2 U11.1
3.3V11: C23.1 JP23.2 SJ12.2 U12.1
3.3V12: C25.1 JP25.2 SJ13.2 U13.1
3.3V13: C27.1 JP27.2 SJ14.2 U14.1
3.3V14: C29.1 JP29.2 SJ15.2 U15.1
3.3V15: C31.1 JP31.2 SJ16.2 U16.1
3.3V16: C33.1 JP33.2 SJ17.2 U17.1
3.3V17: C35.1 JP35.2 SJ18.2 U18.1
3.3V18: C37.1 JP37.2 SJ19.2 U19.1
3.3V19: C39.1 JP39.2 SJ20.2 U20.1
3.3V20: C41.1 JP41.2 SJ21.2 U21.1
3.3V21: C43.1 JP43.2 SJ22.2 U22.1
3.3V22: C45.1 JP45.2 SJ23.2 U23.1
3.3V23: C47.1 JP47.2 SJ24.2 U24.1
3.3V24: C49.1 JP49.2 SJ25.2 U25.1
3.3V25: C51.1 JP51.2 SJ26.2 U26.1
3.3V26: C53.1 JP53.2 SJ27.2 U27.1
3.3V27: C55.1 JP55.2 SJ28.2 U28.1
3.3V28: C57.1 JP57.2 SJ29.2 U29.1
3.3V29: C59.1 JP59.2 SJ30.2 U30.1
3.3V30: C61.1 JP61.2 SJ31.2 U31.1
3.3V31: C63.1 JP63.2 SJ32.2 U32.1
3.3V32: C65.1 JP65.2 SJ33.2 U33.1
3.3V33: C67.1 JP67.2 SJ34.2 U34.1
3.3V34: C69.1 JP69.2 SJ35.2 U35.1
3.3V35: C71.1 JP71.2 SJ36.2 U36.1
3.3V36: C73.1 JP73.2 SJ37.2 U37.1
3.3V37: C75.1 JP75.2 SJ38.2 U38.1
3.3V38: C77.1 JP77.2 SJ39.2 U39.1
3.3V39: C79.1 JP79.2 SJ40.2 U40.1
5V: C2.1 JP2.2 U1.14
5V1: C4.1 JP4.2 U2.14
5V2: C6.1 JP6.2 U3.14
5V3: C8.1 JP8.2 U4.14
5V4: C10.1 JP10.2 U5.14
5V5: C12.1 JP12.2 U6.14
5V6: C14.1 JP14.2 U7.14
5V7: C16.1 JP16.2 U8.14
5V8: C18.1 JP18.2 U9.14
5V9: C20.1 JP20.2 U10.14
5V10: C22.1 JP22.2 U11.14
5V11: C24.1 JP24.2 U12.14
5V12: C26.1 JP26.2 U13.14
5V13: C28.1 JP28.2 U14.14
5V14: C30.1 JP30.2 U15.14
5V15: C32.1 JP32.2 U16.14
5V16: C34.1 JP34.2 U17.14
5V17: C36.1 JP36.2 U18.14
5V18: C38.1 JP38.2 U19.14
5V19: C40.1 JP40.2 U20.14
5V20: C42.1 JP42.2 U21.14
5V21: C44.1 JP44.2 U22.14
5V22: C46.1 JP46.2 U23.14
5V23: C48.1 JP48.2 U24.14
5V24: C50.1 JP50.2 U25.14
5V25: C52.1 JP52.2 U26.14
5V26: C54.1 JP54.2 U27.14
5V27: C56.1 JP56.2 U28.14
5V28: C58.1 JP58.2 U29.14
5V29: C60.1 JP60.2 U30.14
5V30: C62.1 JP62.2 U31.14
5V31: C64.1 JP64.2 U32.14
5V32: C66.1 JP66.2 U33.14
5V33: C68.1 JP68.2 U34.14
5V34: C70.1 JP70.2 U35.14
5V35: C72.1 JP72.2 U36.14
5V36: C74.1 JP74.2 U37.14
5V37: C76.1 JP76.2 U38.14
5V38: C78.1 JP78.2 U39.14
5V39: C80.1 JP80.2 U40.14
B1: JP2.6 U1.13
B2: JP2.5 U1.12
B3: JP2.4 U1.11
B4: JP2.3 U1.10
B5: JP4.6 U2.13
B6: JP4.5 U2.12
B7: JP4.4 U2.11
B8: JP4.3 U2.10
B9: JP6.6 U3.13
B10: JP6.5 U3.12
B11: JP6.4 U3.11
B12: JP6.3 U3.10
B13: JP8.6 U4.13
B14: JP8.5 U4.12
B15: JP8.4 U4.11
B16: JP8.3 U4.10
B17: JP10.6 U5.13
B18: JP10.5 U5.12
B19: JP10.4 U5.11
B20: JP10.3 U5.10
B21: JP12.6 U6.13
B22: JP12.5 U6.12
B23: JP12.4 U6.11
B24: JP12.3 U6.10
B25: JP14.6 U7.13
B26: JP14.5 U7.12
B27: JP14.4 U7.11
B28: JP14.3 U7.10
B29: JP16.6 U8.13
B30: JP16.5 U8.12
B31: JP16.4 U8.11
B32: JP16.3 U8.10
B33: JP18.6 U9.13
B34: JP18.5 U9.12
B35: JP18.4 U9.11
B36: JP18.3 U9.10
B37: JP20.6 U10.13
B38: JP20.5 U10.12
B39: JP20.4 U10.11
B40: JP20.3 U10.10
B41: JP22.6 U11.13
B42: JP22.5 U11.12
B43: JP22.4 U11.11
B44: JP22.3 U11.10
B45: JP24.6 U12.13
B46: JP24.5 U12.12
B47: JP24.4 U12.11
B48: JP24.3 U12.10
B49: JP26.6 U13.13
B50: JP26.5 U13.12
B51: JP26.4 U13.11
B52: JP26.3 U13.10
B53: JP28.6 U14.13
B54: JP28.5 U14.12
B55: JP28.4 U14.11
B56: JP28.3 U14.10
B57: JP30.6 U15.13
B58: JP30.5 U15.12
B59: JP30.4 U15.11
B60: JP30.3 U15.10
B61: JP32.6 U16.13
B62: JP32.5 U16.12
B63: JP32.4 U16.11
B64: JP32.3 U16.10
B65: JP34.6 U17.13
B66: JP34.5 U17.12
B67: JP34.4 U17.11
B68: JP34.3 U17.10
B69: JP36.6 U18.13
B70: JP36.5 U18.12
B71: JP36.4 U18.11
B72: JP36.3 U18.10
B73: JP38.6 U19.13
B74: JP38.5 U19.12
B75: JP38.4 U19.11
B76: JP38.3 U19.10
B77: JP40.6 U20.13
B78: JP40.5 U20.12
B79: JP40.4 U20.11
B80: JP40.3 U20.10
B81: JP42.6 U21.13
B82: JP42.5 U21.12
B83: JP42.4 U21.11
B84: JP42.3 U21.10
B85: JP44.6 U22.13
B86: JP44.5 U22.12
B87: JP44.4 U22.11
B88: JP44.3 U22.10
B89: JP46.6 U23.13
B90: JP46.5 U23.12
B91: JP46.4 U23.11
B92: JP46.3 U23.10
B93: JP48.6 U24.13
B94: JP48.5 U24.12
B95: JP48.4 U24.11
B96: JP48.3 U24.10
B97: JP50.6 U25.13
B98: JP50.5 U25.12
B99: JP50.4 U25.11
B100: JP50.3 U25.10
B101: JP52.6 U26.13
B102: JP52.5 U26.12
B103: JP52.4 U26.11
B104: JP52.3 U26.10
B105: JP54.6 U27.13
B106: JP54.5 U27.12
B107: JP54.4 U27.11
B108: JP54.3 U27.10
B109: JP56.6 U28.13
B110: JP56.5 U28.12
B111: JP56.4 U28.11
B112: JP56.3 U28.10
B113: JP58.6 U29.13
B114: JP58.5 U29.12
B115: JP58.4 U29.11
B116: JP58.3 U29.10
B117: JP60.6 U30.13
B118: JP60.5 U30.12
B119: JP60.4 U30.11
B120: JP60.3 U30.10
B121: JP62.6 U31.13
B122: JP62.5 U31.12
B123: JP62.4 U31.11
B124: JP62.3 U31.10
B125: JP64.6 U32.13
B126: JP64.5 U32.12
B127: JP64.4 U32.11
B128: JP64.3 U32.10
B129: JP66.6 U33.13
B130: JP66.5 U33.12
B131: JP66.4 U33.11
B132: JP66.3 U33.10
B133: JP68.6 U34.13
B134: JP68.5 U34.12
B135: JP68.4 U34.11
B136: JP68.3 U34.10
B137: JP70.6 U35.13
B138: JP70.5 U35.12
B139: JP70.4 U35.11
B140: JP70.3 U35.10
B141: JP72.6 U36.13
B142: JP72.5 U36.12
B143: JP72.4 U36.11
B144: JP72.3 U36.10
B145: JP74.6 U37.13
B146: JP74.5 U37.12
B147: JP74.4 U37.11
B148: JP74.3 U37.10
B149: JP76.6 U38.13
B150: JP76.5 U38.12
B151: JP76.4 U38.11
B152: JP76.3 U38.10
B153: JP78.6 U39.13
B154: JP78.5 U39.12
B155: JP78.4 U39.11
B156: JP78.3 U39.10
B157: JP80.6 U40.13
B158: JP80.5 U40.12
B159: JP80.4 U40.11
B160: JP80.3 U40.10
GND: C1.2 C2.2 JP1.1 JP2.1 U1.7
GND1: C3.2 C4.2 JP3.1 JP4.1 U2.7
GND2: C5.2 C6.2 JP5.1 JP6.1 U3.7
GND3: C7.2 C8.2 JP7.1 JP8.1 U4.7
GND4: C9.2 C10.2 JP9.1 JP10.1 U5.7
GND5: C11.2 C12.2 JP11.1 JP12.1 U6.7
GND6: C13.2 C14.2 JP13.1 JP14.1 U7.7
GND7: C15.2 C16.2 JP15.1 JP16.1 U8.7
GND8: C17.2 C18.2 JP17.1 JP18.1 U9.7
GND9: C19.2 C20.2 JP19.1 JP20.1 U10.7
GND10: C21.2 C22.2 JP21.1 JP22.1 U11.7
GND11: C23.2 C24.2 JP23.1 JP24.1 U12.7
GND12: C25.2 C26.2 JP25.1 JP26.1 U13.7
GND13: C27.2 C28.2 JP27.1 JP28.1 U14.7
GND14: C29.2 C30.2 JP29.1 JP30.1 U15.7
GND15: C31.2 C32.2 JP31.1 JP32.1 U16.7
GND16: C33.2 C34.2 JP33.1 JP34.1 U17.7
GND17: C35.2 C36.2 JP35.1 JP36.1 U18.7
GND18: C37.2 C38.2 JP37.1 JP38.1 U19.7
GND19: C39.2 C40.2 JP39.1 JP40.1 U20.7
GND20: C41.2 C42.2 JP41.1 JP42.1 U21.7
GND21: C43.2 C44.2 JP43.1 JP44.1 U22.7
GND22: C45.2 C46.2 JP45.1 JP46.1 U23.7
GND23: C47.2 C48.2 JP47.1 JP48.1 U24.7
GND24: C49.2 C50.2 JP49.1 JP50.1 U25.7
GND25: C51.2 C52.2 JP51.1 JP52.1 U26.7
GND26: C53.2 C54.2 JP53.1 JP54.1 U27.7
GND27: C55.2 C56.2 JP55.1 JP56.1 U28.7
GND28: C57.2 C58.2 JP57.1 JP58.1 U29.7
GND29: C59.2 C60.2 JP59.1 JP60.1 U30.7
GND30: C61.2 C62.2 JP61.1 JP62.1 U31.7
GND31: C63.2 C64.2 JP63.1 JP64.1 U32.7
GND32: C65.2 C66.2 JP65.1 JP66.1 U33.7
GND33: C67.2 C68.2 JP67.1 JP68.1 U34.7
GND34: C69.2 C70.2 JP69.1 JP70.1 U35.7
GND35: C71.2 C72.2 JP71.1 JP72.1 U36.7
GND36: C73.2 C74.2 JP73.1 JP74.1 U37.7
GND37: C75.2 C76.2 JP75.1 JP76.1 U38.7
GND38: C77.2 C78.2 JP77.1 JP78.1 U39.7
GND39: C79.2 C80.2 JP79.1 JP80.1 U40.7
N$1: JP1.3 U1.5
N$2: JP1.4 U1.4
N$3: JP1.5 U1.3
N$4: JP1.6 U1.2
N$5: JP3.3 U2.5
N$6: JP3.4 U2.4
N$7: JP3.5 U2.3
N$8: JP3.6 U2.2
N$9: JP5.3 U3.5
N$10: JP5.4 U3.4
N$11: JP5.5 U3.3
N$12: JP5.6 U3.2
N$13: JP7.3 U4.5
N$14: JP7.4 U4.4
N$15: JP7.5 U4.3
N$16: JP7.6 U4.2
N$17: JP9.3 U5.5
N$18: JP9.4 U5.4
N$19: JP9.5 U5.3
N$20: JP9.6 U5.2
N$21: JP11.3 U6.5
N$22: JP11.4 U6.4
N$23: JP11.5 U6.3
N$24: JP11.6 U6.2
N$25: JP13.3 U7.5
N$26: JP13.4 U7.4
N$27: JP13.5 U7.3
N$28: JP13.6 U7.2
N$29: JP15.3 U8.5
N$30: JP15.4 U8.4
N$31: JP15.5 U8.3
N$32: JP15.6 U8.2
N$33: JP17.3 U9.5
N$34: JP17.4 U9.4
N$35: JP17.5 U9.3
N$36: JP17.6 U9.2
N$37: JP19.3 U10.5
N$38: JP19.4 U10.4
N$39: JP19.5 U10.3
N$40: JP19.6 U10.2
N$41: JP21.3 U11.5
N$42: JP21.4 U11.4
N$43: JP21.5 U11.3
N$44: JP21.6 U11.2
N$45: JP23.3 U12.5
N$46: JP23.4 U12.4
N$47: JP23.5 U12.3
N$48: JP23.6 U12.2
N$49: JP25.3 U13.5
N$50: JP25.4 U13.4
N$51: JP25.5 U13.3
N$52: JP25.6 U13.2
N$53: JP27.3 U14.5
N$54: JP27.4 U14.4
N$55: JP27.5 U14.3
N$56: JP27.6 U14.2
N$57: JP29.3 U15.5
N$58: JP29.4 U15.4
N$59: JP29.5 U15.3
N$60: JP29.6 U15.2
N$61: JP31.3 U16.5
N$62: JP31.4 U16.4
N$63: JP31.5 U16.3
N$64: JP31.6 U16.2
N$65: JP33.3 U17.5
N$66: JP33.4 U17.4
N$67: JP33.5 U17.3
N$68: JP33.6 U17.2
N$69: JP35.3 U18.5
N$70: JP35.4 U18.4
N$71: JP35.5 U18.3
N$72: JP35.6 U18.2
N$73: JP37.3 U19.5
N$74: JP37.4 U19.4
N$75: JP37.5 U19.3
N$76: JP37.6 U19.2
N$77: JP39.3 U20.5
N$78: JP39.4 U20.4
N$79: JP39.5 U20.3
N$80: JP39.6 U20.2
N$81: JP41.3 U21.5
N$82: JP41.4 U21.4
N$83: JP41.5 U21.3
N$84: JP41.6 U21.2
N$85: JP43.3 U22.5
N$86: JP43.4 U22.4
N$87: JP43.5 U22.3
N$88: JP43.6 U22.2
N$89: JP45.3 U23.5
N$90: JP45.4 U23.4
N$91: JP45.5 U23.3
N$92: JP45.6 U23.2
N$93: JP47.3 U24.5
N$94: JP47.4 U24.4
N$95: JP47.5 U24.3
N$96: JP47.6 U24.2
N$97: JP49.3 U25.5
N$98: JP49.4 U25.4
N$99: JP49.5 U25.3
N$100: JP49.6 U25.2
N$101: JP51.3 U26.5
N$102: JP51.4 U26.4
N$103: JP51.5 U26.3
N$104: JP51.6 U26.2
N$105: JP53.3 U27.5
N$106: JP53.4 U27.4
N$107: JP53.5 U27.3
N$108: JP53.6 U27.2
N$109: JP55.3 U28.5
N$110: JP55.4 U28.4
N$111: JP55.5 U28.3
N$112: JP55.6 U28.2
N$113: JP57.3 U29.5
N$114: JP57.4 U29.4
N$115: JP57.5 U29.3
N$116: JP57.6 U29.2
N$117: JP59.3 U30.5
N$118: JP59.4 U30.4
N$119: JP59.5 U30.3
N$120: JP59.6 U30.2
N$121: JP61.3 U31.5
N$122: JP61.4 U31.4
N$123: JP61.5 U31.3
N$124: JP61.6 U31.2
N$125: JP63.3 U32.5
N$126: JP63.4 U32.4
N$127: JP63.5 U32.3
N$128: JP63.6 U32.2
N$129: JP65.3 U33.5
N$130: JP65.4 U33.4
N$131: JP65.5 U33.3
N$132: JP65.6 U33.2
N$133: JP67.3 U34.5
N$134: JP67.4 U34.4
N$135: JP67.5 U34.3
N$136: JP67.6 U34.2
N$137: JP69.3 U35.5
N$138: JP69.4 U35.4
N$139: JP69.5 U35.3
N$140: JP69.6 U35.2
N$141: JP71.3 U36.5
N$142: JP71.4 U36.4
N$143: JP71.5 U36.3
N$144: JP71.6 U36.2
N$145: JP73.3 U37.5
N$146: JP73.4 U37.4
N$147: JP73.5 U37.3
N$148: JP73.6 U37.2
N$149: JP75.3 U38.5
N$150: JP75.4 U38.4
N$151: JP75.5 U38.3
N$152: JP75.6 U38.2
N$153: JP77.3 U39.5
N$154: JP77.4 U39.4
N$155: JP77.5 U39.3
N$156: JP77.6 U39.2
N$157: JP79.3 U40.5
N$158: JP79.4 U40.4
N$159: JP79.5 U40.3
N$160: JP79.6 U40.2
OE: JP1.7 JP2.7 SJ1.1 U1.8
OE1: JP3.7 JP4.7 SJ2.1 U2.8
OE2: JP5.7 JP6.7 SJ3.1 U3.8
OE3: JP7.7 JP8.7 SJ4.1 U4.8
OE4: JP9.7 JP10.7 SJ5.1 U5.8
OE5: JP11.7 JP12.7 SJ6.1 U6.8
OE6: JP13.7 JP14.7 SJ7.1 U7.8
OE7: JP15.7 JP16.7 SJ8.1 U8.8
OE8: JP17.7 JP18.7 SJ9.1 U9.8
OE9: JP19.7 JP20.7 SJ10.1 U10.8
OE10: JP21.7 JP22.7 SJ11.1 U11.8
OE11: JP23.7 JP24.7 SJ12.1 U12.8
OE12: JP25.7 JP26.7 SJ13.1 U13.8
OE13: JP27.7 JP28.7 SJ14.1 U14.8
OE14: JP29.7 JP30.7 SJ15.1 U15.8
OE15: JP31.7 JP32.7 SJ16.1 U16.8
OE16: JP33.7 JP34.7 SJ17.1 U17.8
OE17: JP35.7 JP36.7 SJ18.1 U18.8
OE18: JP37.7 JP38.7 SJ19.1 U19.8
OE19: JP39.7 JP40.7 SJ20.1 U20.8
OE20: JP41.7 JP42.7 SJ21.1 U21.8
OE21: JP43.7 JP44.7 SJ22.1 U22.8
OE22: JP45.7 JP46.7 SJ23.1 U23.8
OE23: JP47.7 JP48.7 SJ24.1 U24.8
OE24: JP49.7 JP50.7 SJ25.1 U25.8
OE25: JP51.7 JP52.7 SJ26.1 U26.8
OE26: JP53.7 JP54.7 SJ27.1 U27.8
OE27: JP55.7 JP56.7 SJ28.1 U28.8
OE28: JP57.7 JP58.7 SJ29.1 U29.8
OE29: JP59.7 JP60.7 SJ30.1 U30.8
OE30: JP61.7 JP62.7 SJ31.1 U31.8
OE31: JP63.7 JP64.7 SJ32.1 U32.8
OE32: JP65.7 JP66.7 SJ33.1 U33.8
OE33: JP67.7 JP68.7 SJ34.1 U34.8
OE34: JP69.7 JP70.7 SJ35.1 U35.8
OE35: JP71.7 JP72.7 SJ36.1 U36.8
OE36: JP73.7 JP74.7 SJ37.1 U37.8
OE37: JP75.7 JP76.7 SJ38.1 U38.8
OE38: JP77.7 JP78.7 SJ39.1 U39.8
OE39: JP79.7 JP80.7 SJ40.1 U40.8